# EAGLE board leanometer (EAGLE 9.6.0)
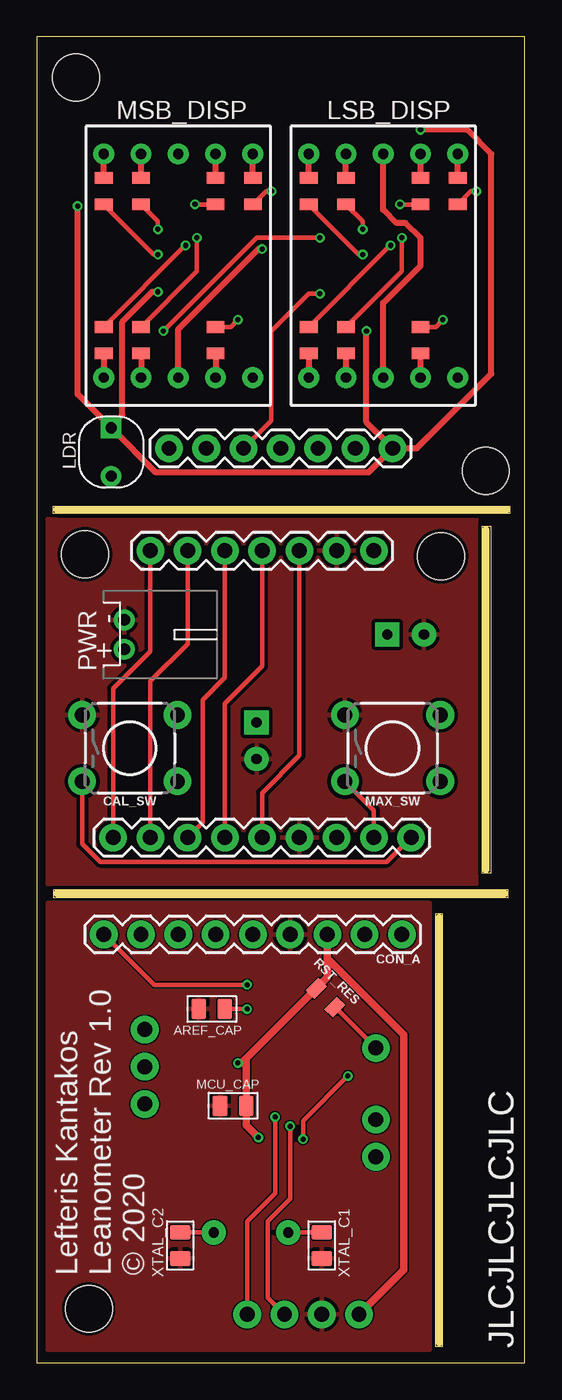
[diagram p0: board, top side]
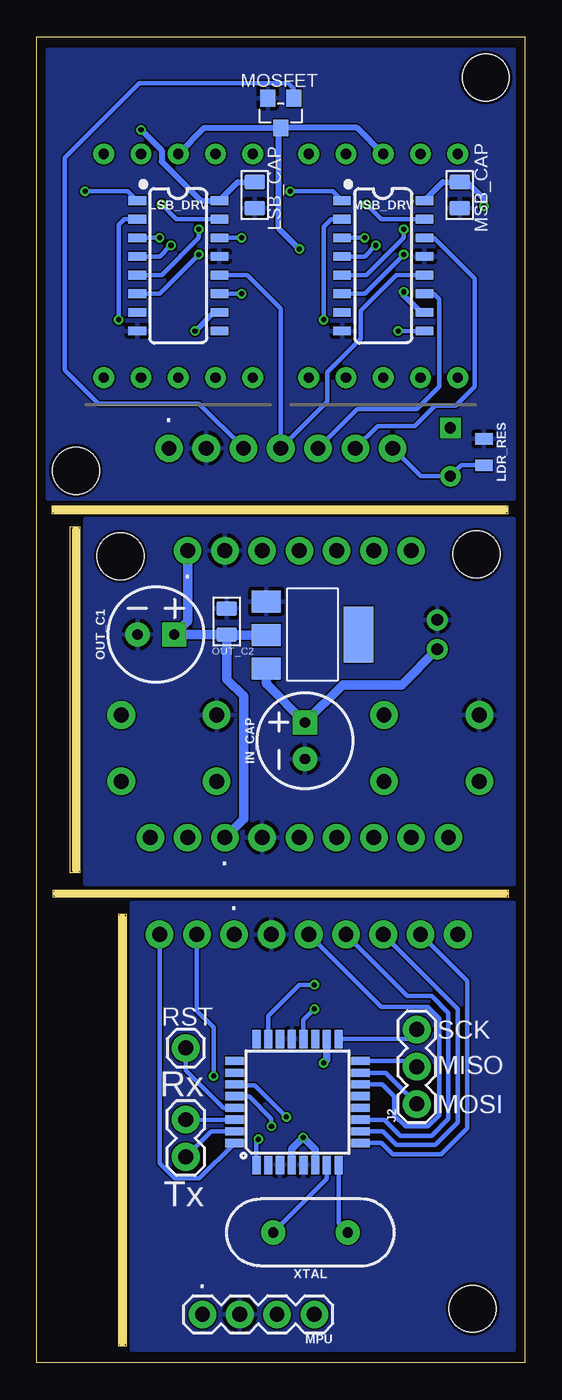
[diagram p1: board, bottom side, seen from below]

Size 33.27 x 90.42 mm. Coordinates in mm from the lower left corner, seen from the top.
Outline: 1.4,58.17 32,58.17
Outline: 30.61,56.77 30.61,33.66
Outline: 1.4,32 31.88,32
Outline: 27.43,30.35 27.43,1.4
Outline: 0,0 33.27,0 33.27,90.42 0,90.42 0,0
Outline: 30.35,57.02 30.35,33.4 30.99,33.4 30.99,57.02 30.35,57.02
Outline: 1.14,57.91 1.14,58.42 32.26,58.42 32.26,57.91 1.14,57.91
Outline: 1.14,32.26 1.14,31.75 32.13,31.75 32.13,32.26 1.14,32.26
Outline: 27.18,30.61 27.18,1.14 27.69,1.14 27.69,30.61 27.18,30.61
Copper layers (1*16): Top 0.035mm / dielectric 1.5mm / Bottom 0.035mm
Design rules "aisler_2_layer": minimum track width 0.1mm, minimum drill 0.2mm, track to track 0.1mm, track to pad 0.1mm, pad to pad 0.1mm, via to via 0.1mm, smd to smd 0.1mm, copper to edge 0.2mm, drill to drill 0.21mm, minimum pad ring 0.25mm, minimum via ring 0.15mm, stop-mask expansion 0mil, vias tented up to drill 0mil, thermal gap 10mil
Holes 3.2 mm at 30.61,60.83 2.67,87.63 3.3,55.12 27.56,54.99 3.56,3.68

## Footprints (pad centres in the part's own frame; a part is rotated, then mirrored left to right if it is on the bottom)
C0805 = smd 1.397 x 1.016: 1 0,0.889; 2 0,-0.889
TACTILE_SWITCH_PTH_6.0MM = drill 1.016 pad 1.88: 1 -3.251,2.261; 2 3.251,2.261; 3 -3.251,-2.261; 4 3.251,-2.261
1X09 = drill 1.016 pad 1.88: 1 0,0; 2 2.54,0; 3 5.08,0; 4 7.62,0; 5 10.16,0; 6 12.7,0; 7 15.24,0; 8 17.78,0; 9 20.32,0
1X07 = drill 1.016 pad 1.88: 1 0,0; 2 2.54,0; 3 5.08,0; 4 7.62,0; 5 10.16,0; 6 12.7,0; 7 15.24,0
CPOL-RADIAL-2.5MM-6.5MM = drill 0.7 pad 1.651 square: 1 1.25,0 | drill 0.7 pad 1.651: 2 -1.25,0
1X03 = drill 1.016 pad 1.88: 1 0,0; 2 2.54,0; 3 5.08,0
SNR2-3.0 = drill 0.762 pad 1.397 square: 1 -1.651,0 | drill 0.762 pad 1.397: 2 1.651,0
0805 = smd 0.8 x 1.2: 1 -0.9,0; 2 0.9,0
0.56''_LED_DISPLAY = drill 0.7 pad 1.422: 1 -5.08,-7.62; 2 -2.54,-7.62; 3 0,-7.62; 4 2.54,-7.62; 5 5.08,-7.62; 6 5.08,7.62; 7 2.54,7.62; 8 0,7.62; 9 -2.54,7.62; 10 -5.08,7.62
SO16 = smd 0.6 x 1.2: 1 -4.445,-2.8; 2 -3.175,-2.8; 3 -1.905,-2.8; 4 -0.635,-2.8; 5 0.635,-2.8; 6 1.905,-2.8; 7 3.175,-2.8; 8 4.445,-2.8; 9 4.445,2.8; 10 3.175,2.8; 11 1.905,2.8; 12 0.635,2.8; 13 -0.635,2.8; 14 -1.905,2.8; 15 -3.175,2.8; 16 -4.445,2.8
SOT-23 = smd 1.016 x 1.143: 1 -0.889,-1.016; 2 0.889,-1.016; 3 0,1.016
1X04 = drill 1.016 pad 1.88: 1 0,0; 2 2.54,0; 3 5.08,0; 4 7.62,0
JST-PH-2-THM-RA = drill 0.8 pad 1.422: 1 1,0; 2 -1,0
1X01 = drill 1.016 pad 1.88: 1 0,0
TQFP32-08 = smd 1.27 x 0.559: 1 -4.293,2.8; 2 -4.293,2; 3 -4.293,1.2; 4 -4.293,0.4; 5 -4.293,-0.4; 6 -4.293,-1.2; 7 -4.293,-2; 8 -4.293,-2.8; 17 4.293,-2.8; 18 4.293,-2; 19 4.293,-1.2; 20 4.293,-0.4; 21 4.293,0.4; 22 4.293,1.2; 23 4.293,2; 24 4.293,2.8 | smd 0.559 x 1.27: 9 -2.8,-4.293; 10 -2,-4.293; 11 -1.2,-4.293; 12 -0.4,-4.293; 13 0.4,-4.293; 14 1.2,-4.293; 15 2,-4.293; 16 2.8,-4.293; 25 2.8,4.293; 26 2,4.293; 27 1.2,4.293; 28 0.4,4.293; 29 -0.4,4.293; 30 -1.2,4.293; 31 -2,4.293; 32 -2.8,4.293
1X02 = drill 1.016 pad 1.88: 1 0,0; 2 2.54,0
SOT223 = smd 1.499 x 2.007: 1 -2.261,-3.15; 2 0.025,-3.15; 3 2.311,-3.15 | smd 3.81 x 2.007: 4 0,3.15
HC49US = drill 0.7 pad 1.651: 1 -2.54,0; 2 2.54,0

## Placement (x,y rotation side)
AREF_CAP  100nf  [C0805]  11.94,24.13 270 top
CAL_SW  MOM-SWITCH  [TACTILE_SWITCH_PTH_6.0MM]  6.35,41.91 0 top
CON_A  [1X09]  24.89,29.21 180 top
CON_B1  [1X09]  25.53,35.81 180 top
CON_B2  [1X07]  22.99,55.37 180 top
CON_C  [1X07]  24.26,62.36 180 top
IN_CAP  47uF  [CPOL-RADIAL-2.5MM-6.5MM]  14.99,42.42 90 bottom
J2  [1X03]  7.37,17.65 90 bottom
LDR  PHOTORESISTOR-5528-10K  [SNR2-3.0]  5.08,62.1 270 top
LDR_RES  10K  [0805]  2.79,62.1 90 bottom
LSB_CAP  100nf  [C0805]  18.41,79.63 180 bottom
LSB_DISP  [0.56''_LED_DISPLAY]  23.62,74.8 0 top
LSB_DRV  SN74HC595D  [SO16]  23.62,74.8 270 bottom
MAX_SW  MOM-SWITCH  [TACTILE_SWITCH_PTH_6.0MM]  24.26,41.91 0 top
MCU_CAP  100nf  [C0805]  13.39,17.53 270 top
MOSFET  BSS138W-7-F  [SOT-23]  16.64,85.22 180 bottom
MPU  [1X04]  14.35,3.3 180 bottom
MSB_CAP  100nf  [C0805]  4.45,79.63 180 bottom
MSB_DISP  [0.56''_LED_DISPLAY]  9.65,74.8 0 top
MSB_DRV  SN74HC595D  [SO16]  9.65,74.8 270 bottom
OUT_C1  47uF  [CPOL-RADIAL-2.5MM-6.5MM]  25.15,49.66 0 bottom
OUT_C2  100nf  [C0805]  20.32,50.55 180 bottom
PWR  [JST-PH-2-THM-RA]  5.97,49.66 270 top
R1  100  [0805]  12.19,79.88 90 top
R2  100  [0805]  14.73,79.88 90 top
R3  100  [0805]  12.19,69.72 270 top
R4  100  [0805]  7.11,69.72 270 top
R5  100  [0805]  4.57,69.72 270 top
R6  100  [0805]  7.11,79.88 90 top
R7  100  [0805]  4.57,79.88 90 top
R8  100  [0805]  26.16,79.88 90 top
R9  100  [0805]  28.7,79.88 90 top
R10  100  [0805]  26.16,69.72 270 top
R11  100  [0805]  21.08,69.72 270 top
R12  100  [0805]  18.54,69.72 270 top
R13  100  [0805]  21.08,79.88 90 top
R14  100  [0805]  18.54,79.88 90 top
RST  [1X01]  23.11,21.46 0 bottom
RST_RES  10K  [0805]  19.68,24.89 315 top
U3  ATMEGA328P_TQFP  [TQFP32-08]  15.49,17.78 90 bottom
UART  [1X02]  23.11,16.59 270 bottom
V_REG  REG1117-3.3  [SOT223]  14.48,49.66 270 bottom
XTAL  8MHz  [HC49US]  14.61,8.89 180 bottom
XTAL_C1  22pf  [C0805]  19.43,8 180 top
XTAL_C2  22pf  [C0805]  9.78,8 180 top

## Library data of the parts
AREF_CAP LSB_CAP MCU_CAP MSB_CAP OUT_C2 XTAL_C1 XTAL_C2 = Seeed-Capacitor; MPN: CC0805KRX7R9BB104
CAL_SW MAX_SW = SparkFun-Switches; PROD_ID: SWCH-08441; SF_SKU: COM-00097
CON_A CON_B1 CON_B2 CON_C J2 RST UART = SparkFun-Connectors
IN_CAP OUT_C1 = SparkFun-Capacitors; PROD_ID: CAP-08439
LDR = Seeed-Sensor; MPN: PHOTORESISTOR-5528-10K
LDR_RES R1-R14 RST_RES = SparkFun-Resistors
LSB_DISP MSB_DISP = gto
LSB_DRV MSB_DRV = SparkFun-IC-Logic; PROD_ID: IC-07875
MOSFET = OPL_Discrete_Semiconductor; MPN: BSS138W-7-F
MPU = SparkFun-Connectors; PROD_ID: CONN-09696
PWR = adafruit
U3 = SparkFun-IC-Microcontroller; PROD_ID: IC-09069
V_REG = burr-brown; MPN: REG1117; OC_FARNELL: 1097566; OC_NEWARK: 14P6981
XTAL = SparkFun-Clocks; PROD_ID: XTAL-08181; SF_ID: COM-00536

## Nets
3.3V_A: CON_A.3 MCU_CAP.1 MPU.4 RST_RES.1 U3.4 U3.6 U3.18
3.3V_B: CON_B1.3 CON_B2.1 OUT_C1.1 OUT_C2.1 V_REG.2
3.3V_C: CON_C.1 LDR.1 LSB_CAP.2 LSB_DRV.10 LSB_DRV.16 MSB_CAP.2 MSB_DRV.10 MSB_DRV.16
BRIG_A: CON_A.5 U3.14
BRIG_B: CON_B1.5 CON_B2.3
BRIG_C: CON_C.3 MOSFET.1
CAL_A: CON_A.1 U3.32
CAL_B: CAL_SW.3 CON_B1.1
GND_A: AREF_CAP.2 CON_A.4 MCU_CAP.2 MPU.3 U3.3 U3.5 U3.21 XTAL_C1.1 XTAL_C2.1
GND_B: CAL_SW.1 CON_B1.4 CON_B2.2 IN_CAP.2 MAX_SW.1 OUT_C1.2 OUT_C2.2 PWR.2 V_REG.1
GND_C: CON_C.2 LDR_RES.2 LSB_CAP.1 LSB_DRV.8 LSB_DRV.13 MOSFET.2 MSB_CAP.1 MSB_DRV.8 MSB_DRV.13
LDR_A: CON_A.9 U3.23
LDR_B: CON_B1.9 CON_B2.7
LDR_C: CON_C.7 LDR.2 LDR_RES.1
MAX_A: CON_A.2 U3.1
MAX_B: CON_B1.2 MAX_SW.3
MISO: J2.2 U3.16
MOSI: J2.1 U3.15
N$1: MSB_DISP.7 R1.2
N$2: MSB_DISP.6 R2.2
N$3: MSB_DISP.4 R3.2
N$4: MSB_DISP.2 R4.2
N$5: MSB_DISP.1 R5.2
N$6: MSB_DISP.9 R6.2
N$7: MSB_DISP.10 R7.2
N$8: LSB_DISP.7 R8.2
N$9: LSB_DISP.6 R9.2
N$10: LSB_DISP.4 R10.2
N$11: LSB_DISP.2 R11.2
N$12: LSB_DISP.1 R12.2
N$13: LSB_DISP.9 R13.2
N$14: LSB_DISP.10 R14.2
N$15: MSB_DRV.1 R2.1
N$16: LSB_DRV.1 R9.1
N$17: MSB_DRV.2 R3.1
N$18: MSB_DRV.3 R4.1
N$19: MSB_DRV.4 R5.1
N$20: MSB_DRV.5 R6.1
N$21: MSB_DRV.6 R7.1
N$22: MSB_DRV.15 R1.1
N$23: LSB_DRV.15 R8.1
N$24: LSB_DRV.2 R10.1
N$25: LSB_DRV.3 R11.1
N$26: LSB_DRV.4 R12.1
N$27: LSB_DRV.5 R13.1
N$28: LSB_DRV.6 R14.1
N$29: LSB_DRV.14 MSB_DRV.9
N$30: LSB_DISP.3 LSB_DISP.8 MOSFET.3 MSB_DISP.3 MSB_DISP.8
N$31: U3.7 XTAL.2 XTAL_C1.2
N$32: U3.8 XTAL.1 XTAL_C2.2
N$37: AREF_CAP.1 U3.20
RCLK_A: CON_A.6 U3.11
RCLK_B: CON_B1.6 CON_B2.4
RCLK_C: CON_C.4 LSB_DRV.12 MSB_DRV.12
RST: RST.1 RST_RES.2 U3.29
RX_A: U3.30 UART.1
SCK: J2.3 U3.17
SCL_A: MPU.2 U3.28
SCLK_A: CON_A.7 U3.10
SCLK_B: CON_B1.7 CON_B2.5
SCLK_C: CON_C.5 LSB_DRV.11 MSB_DRV.11
SDA_A: MPU.1 U3.27
SER_A: CON_A.8 U3.9
SER_B: CON_B1.8 CON_B2.6
SER_C: CON_C.6 MSB_DRV.14
TX_A: U3.31 UART.2
VBAT: IN_CAP.1 PWR.1 V_REG.3

## Tracks (layer width: path | path; a pad name or v marks a point on that pad's centre or on a via)
3.3V_A  (via drill 0.35)
  Top 0.508: CON_A.3 19.81,27.56 | 19.81,27.56 19.81,26.29 RST_RES.1 14.27,20.76 | 14.27,20.76 13.97,20.45 v13.72,20.45 | v15.11,15.37 14.27,16.21 MCU_CAP.1 14.27,20.76 | MPU.4 25.02,6.35 25.02,22.35 19.81,27.56
  Bottom 0.508: U3.18 13.49,20.67 v13.72,20.45 | U3.6 14.29,14.55 v15.11,15.37 15.89,14.59 U3.4
3.3V_B
  Bottom 0.635: V_REG.2 20.3,49.63 OUT_C2.1 | OUT_C2.1 OUT_C1.1 22.99,50.57 CON_B2.1 | CON_B1.3 19.18,37.08 19.18,45.47 20.32,46.61 OUT_C2.1
3.3V_C  (via drill 0.35)
  Top 0.406: CON_C.1 22.48,64.14 v22.48,70.36 | CON_C.1 22.61,60.71 8.13,60.71 LDR.1 | LDR.1 5.08,63.88 5.84,64.64 5.84,70.99 7.87,73.03 v8.25,73.03 | LDR.1 2.79,66.04 v2.79,78.87 | CON_C.1 25.91,62.36 30.99,67.44 30.99,82.42 29.34,84.07 v26.16,84.07
  Bottom 0.406: LSB_CAP.2 19.55,80.52 LSB_DRV.16 22.1,79.25 24.77,81.92 24.77,82.68 v26.16,84.07 | MSB_DRV.16 5.58,80.52 MSB_CAP.2 3.94,80.52 2.79,79.38 v2.79,78.87 | v22.48,70.36 21.21,71.63 LSB_DRV.10 | v8.25,73.03 8.25,72.77 7.11,71.63 MSB_DRV.10
BRIG_A
  Bottom 0.305: CON_A.5 9.78,24.26 6.6,24.26 5.84,23.5 5.84,16.89 6.6,16.13 8.13,16.13 8.89,16.89 8.89,18.16 9.71,18.98 U3.14
BRIG_B
  Top 0.305: CON_B2.3 17.91,41.4 15.37,38.86 CON_B1.5
BRIG_C
  Bottom 0.305: MOSFET.1 15.75,86.87 16.13,87.25 26.29,87.25 31.37,82.17 31.37,67.69 29.08,65.41 22.22,65.41 CON_C.3
CAL_A
  Bottom 0.305: CON_A.1 24.89,13.59 23.88,12.57 22.19,12.57 U3.32
CAL_B
  Top 0.305: CAL_SW.3 3.1,35.38 4.32,34.16 23.88,34.16 CON_B1.1
GND_A
  pour Top: 0.76,31.37 0.76,0.89 26.8,0.89 26.8,31.37
  pour Bottom: 26.8,31.37 0.76,31.37 0.76,0.89 26.8,0.89
GND_B
  pour Top (isolate 0.254, rank 2): 0.76,57.53 0.76,32.64 29.97,32.64 29.97,57.53
  pour Bottom: 0.76,32.64 29.97,32.64 29.97,57.53 0.76,57.53
GND_C
  pour Bottom: 0.76,58.93 32.51,58.93 32.51,89.54 0.76,89.54
LDR_A  (via drill 0.35)
  Top 0.305: CON_A.9 8,25.78 v14.35,25.78
  Bottom 0.305: v14.35,25.78 15.37,25.78 17.49,23.65 U3.23
LDR_B
  Top 0.305: CON_B2.7 7.75,48.51 5.21,45.97 CON_B1.9
LDR_C
  Bottom 0.305: LDR_RES.1 4.33,61.2 LDR.2 7.11,60.45 CON_C.7
MAX_A  (via drill 0.35)
  Top 0.305: v21.21,19.56 18.16,16.51 v18.16,15.24
  Bottom 0.305: CON_A.2 22.35,24 21.21,22.86 v21.21,19.56 | v18.16,15.24 18.29,15.11 U3.1
MAX_B
  Top 0.305: MAX_SW.3 22.99,37.67 CON_B1.2
MISO
  Bottom 0.305: U3.16 7.75,20.58 J2.2
MOSI
  Bottom 0.305: U3.15 9.49,19.78 J2.1
N$1
  Top 0.406: R1.2 MSB_DISP.7
N$2
  Top 0.406: R2.2 MSB_DISP.6
N$3
  Top 0.406: R3.2 MSB_DISP.4
N$4
  Top 0.406: R4.2 MSB_DISP.2
N$5
  Top 0.406: R5.2 MSB_DISP.1
N$6
  Top 0.406: R6.2 MSB_DISP.9
N$7
  Top 0.406: R7.2 MSB_DISP.10
N$8
  Top 0.406: R8.2 LSB_DISP.7
N$9
  Top 0.406: R9.2 LSB_DISP.6
N$10
  Top 0.406: LSB_DISP.4 R10.2
N$11
  Top 0.406: R11.2 LSB_DISP.2
N$12
  Top 0.406: R12.2 LSB_DISP.1
N$13
  Top 0.406: R13.2 LSB_DISP.9
N$14
  Top 0.406: R14.2 LSB_DISP.10
N$15  (via drill 0.35)
  Top 0.305: R2.1 15.63,79.88 v16,79.88
  Bottom 0.305: MSB_DRV.1 13.09,79.88 v16,79.88
N$16  (via drill 0.35)
  Top 0.305: R9.1 29.6,79.88 v29.97,79.88
  Bottom 0.305: LSB_DRV.1 27.06,79.88 v29.97,79.88
N$17  (via drill 0.35)
  Top 0.305: R3.1 13.22,70.62 v13.72,71.12
  Bottom 0.305: v13.72,71.12 13.72,77.47 13.21,77.98 MSB_DRV.2
N$18  (via drill 0.35)
  Top 0.305: R4.1 10.92,74.43 v10.92,76.71
  Bottom 0.305: v10.92,76.71 MSB_DRV.3
N$19  (via drill 0.35)
  Top 0.305: R5.1 v10.14,76.19 v10.15,76.19
  Bottom 0.305: v10.15,76.19 10.91,75.44 MSB_DRV.4
N$20  (via drill 0.35)
  Top 0.305: R6.1 8.25,77.84 v8.25,77.3
  Bottom 0.305: v8.25,77.3 8.25,76.71 10.79,74.17 MSB_DRV.5
N$21  (via drill 0.35)
  Top 0.305: R7.1 7.99,75.56 v8.25,75.56
  Bottom 0.305: v8.25,75.56 10.92,72.9 MSB_DRV.6
N$22  (via drill 0.35)
  Top 0.305: R1.1 10.81,78.98
  Top 0.406: 10.81,78.98 v10.79,78.99
  Bottom 0.305: v10.79,78.99 9.78,77.98 MSB_DRV.15
N$23  (via drill 0.35)
  Top 0.305: R8.1 24.78,78.98
  Top 0.406: 24.78,78.98 v24.77,78.99
  Bottom 0.305: v24.77,78.99 23.75,77.98 LSB_DRV.15
N$24  (via drill 0.35)
  Top 0.305: R10.1 27.19,70.62 v27.69,71.12
  Bottom 0.305: v27.69,71.12 27.69,77.6 27.3,77.98 LSB_DRV.2
N$25  (via drill 0.35)
  Top 0.305: R11.1 24.89,74.43 v24.89,76.71
  Bottom 0.305: v24.89,76.71 LSB_DRV.3
N$26  (via drill 0.35)
  Top 0.305: R12.1 v24.11,76.19 v24.12,76.19
  Bottom 0.305: v24.12,76.19 24.14,76.19 24.89,75.44 LSB_DRV.4
N$27  (via drill 0.35)
  Top 0.305: R13.1 22.22,77.84 v22.22,77.3
  Bottom 0.305: v22.22,77.3 22.22,76.71 24.77,74.17 LSB_DRV.5
N$28  (via drill 0.35)
  Top 0.305: R14.1 21.96,75.56 v22.22,75.56
  Bottom 0.305: v22.22,75.56 24.89,72.9 LSB_DRV.6
N$29  (via drill 0.35)
  Top 0.305: v8.64,70.36 14.99,76.71 v19.3,76.71
  Bottom 0.305: MSB_DRV.9 v8.64,70.36 | v19.3,76.71 LSB_DRV.14
N$30  (via drill 0.35)
  Top 0.406: MSB_DISP.3 9.65,70.48 15.11,75.95 v15.37,75.95 | LSB_DISP.3 23.62,72.26 26.16,74.8 26.16,76.71 25.15,77.72 24.51,77.72 23.62,78.61 LSB_DISP.8
  Bottom 0.406: MSB_DISP.8 11.43,84.2 MOSFET.3 16.76,84.2 | LSB_DISP.8 21.84,84.2 16.76,84.2 | v15.37,75.95 16.76,77.34 16.76,84.2
N$31
  Top 0.305: XTAL_C1.2 XTAL.2
  Bottom 0.305: U3.7 13.49,12.54 XTAL.2
N$32
  Top 0.305: XTAL.1 XTAL_C2.2
  Bottom 0.305: U3.8 12.69,9.52 XTAL.1
N$37  (via drill 0.35)
  Top 0.305: AREF_CAP.1 v14.35,24.13
  Bottom 0.305: v14.35,24.13 15.09,23.39 U3.20
RCLK_A
  Bottom 0.305: CON_A.6 8,25.02 6.35,25.02 5.21,23.88 5.21,16.64 6.35,15.49 8.51,15.49 9.59,16.58 U3.11
RCLK_B
  Top 0.305: CON_B1.6 12.83,44.96 15.37,47.5 CON_B2.4
RCLK_C
  Bottom 0.305: MSB_DRV.12 8.76,74.17 11.18,71.76 11.18,69.85 13.46,67.56 13.46,65.53 CON_C.4 16.64,71.88 18.92,74.17 LSB_DRV.12
RST
  Top 0.305: RST_RES.2 | RST_RES.2 RST.1
  Bottom 0.305: RST.1 23.11,19.94 20.55,17.38 U3.29
RX_A
  Bottom 0.305: U3.30 UART.1
SCK
  Bottom 0.305: U3.17 8.03,22.07 J2.3
SCL_A  (via drill 0.35)
  Top 0.305: v17.27,16.13 17.27,11.18 15.75,9.65 15.75,4.45 MPU.2
  Bottom 0.305: U3.28 19.77,18.16 18.8,18.16 17.27,16.64 v17.27,16.13
SCLK_A
  Bottom 0.305: CON_A.7 4.57,24.13 4.57,16.38 6.1,14.86 8.76,14.86 9.68,15.78 U3.10
SCLK_B
  Top 0.305: CON_B2.5 12.83,46.74 11.3,45.21 11.3,36.83 CON_B1.7
SCLK_C  (via drill 0.35)
  Top 0.305: v19.3,72.9 18.54,72.9 16,70.36 16,64.26 CON_C.5
  Bottom 0.305: MSB_DRV.11 6.22,72.9 5.84,72.52 5.84,66.55 7.37,65.02 11.43,65.02 CON_C.5 | LSB_DRV.11 v19.3,72.9
SDA_A  (via drill 0.35)
  Top 0.305: v16.26,16.76 16.26,11.56 14.35,9.65 MPU.1
  Bottom 0.305: U3.27 19.73,18.92 18.41,18.92 v16.26,16.76
SER_A
  Bottom 0.305: CON_A.8 3.94,26.04 3.94,16 5.71,14.22 9.02,14.22 9.78,14.99 U3.9
SER_B
  Top 0.305: CON_B2.6 10.29,49.02 7.75,46.48 CON_B1.8
SER_C
  Bottom 0.305: MSB_DRV.14 6.22,76.71 3.43,73.91 3.43,66.55 4.7,65.28 6.1,65.28 7.49,63.88 10.03,63.88 CON_C.6
TX_A
  Bottom 0.305: U3.31 21.38,15.78 UART.2
VBAT
  Bottom 0.635: V_REG.3 17.63,46.31 IN_CAP.1 12.43,46.23 8.4,46.23 PWR.1

## Text on the board
tPlace: Lefteris Kantakos / Leanometer Rev 1.0 / © 2020 | JLCJLCJLCJLC
bNames: . | . | . | . | RST | SCK | MISO | Rx | MOSI | Tx | .